# Altium PCB Prismino_Copter.PcbDoc
Units mm, origin at the board's own origin, x right, y up, seen from the top; angles counter-clockwise.
Board outline 50 x 50 mm, 2 copper layers (Top Layer, Bottom Layer); 43 components, 36 nets, 199 pads, 44 vias.
Unrouted connection lines stored in the file: 2.
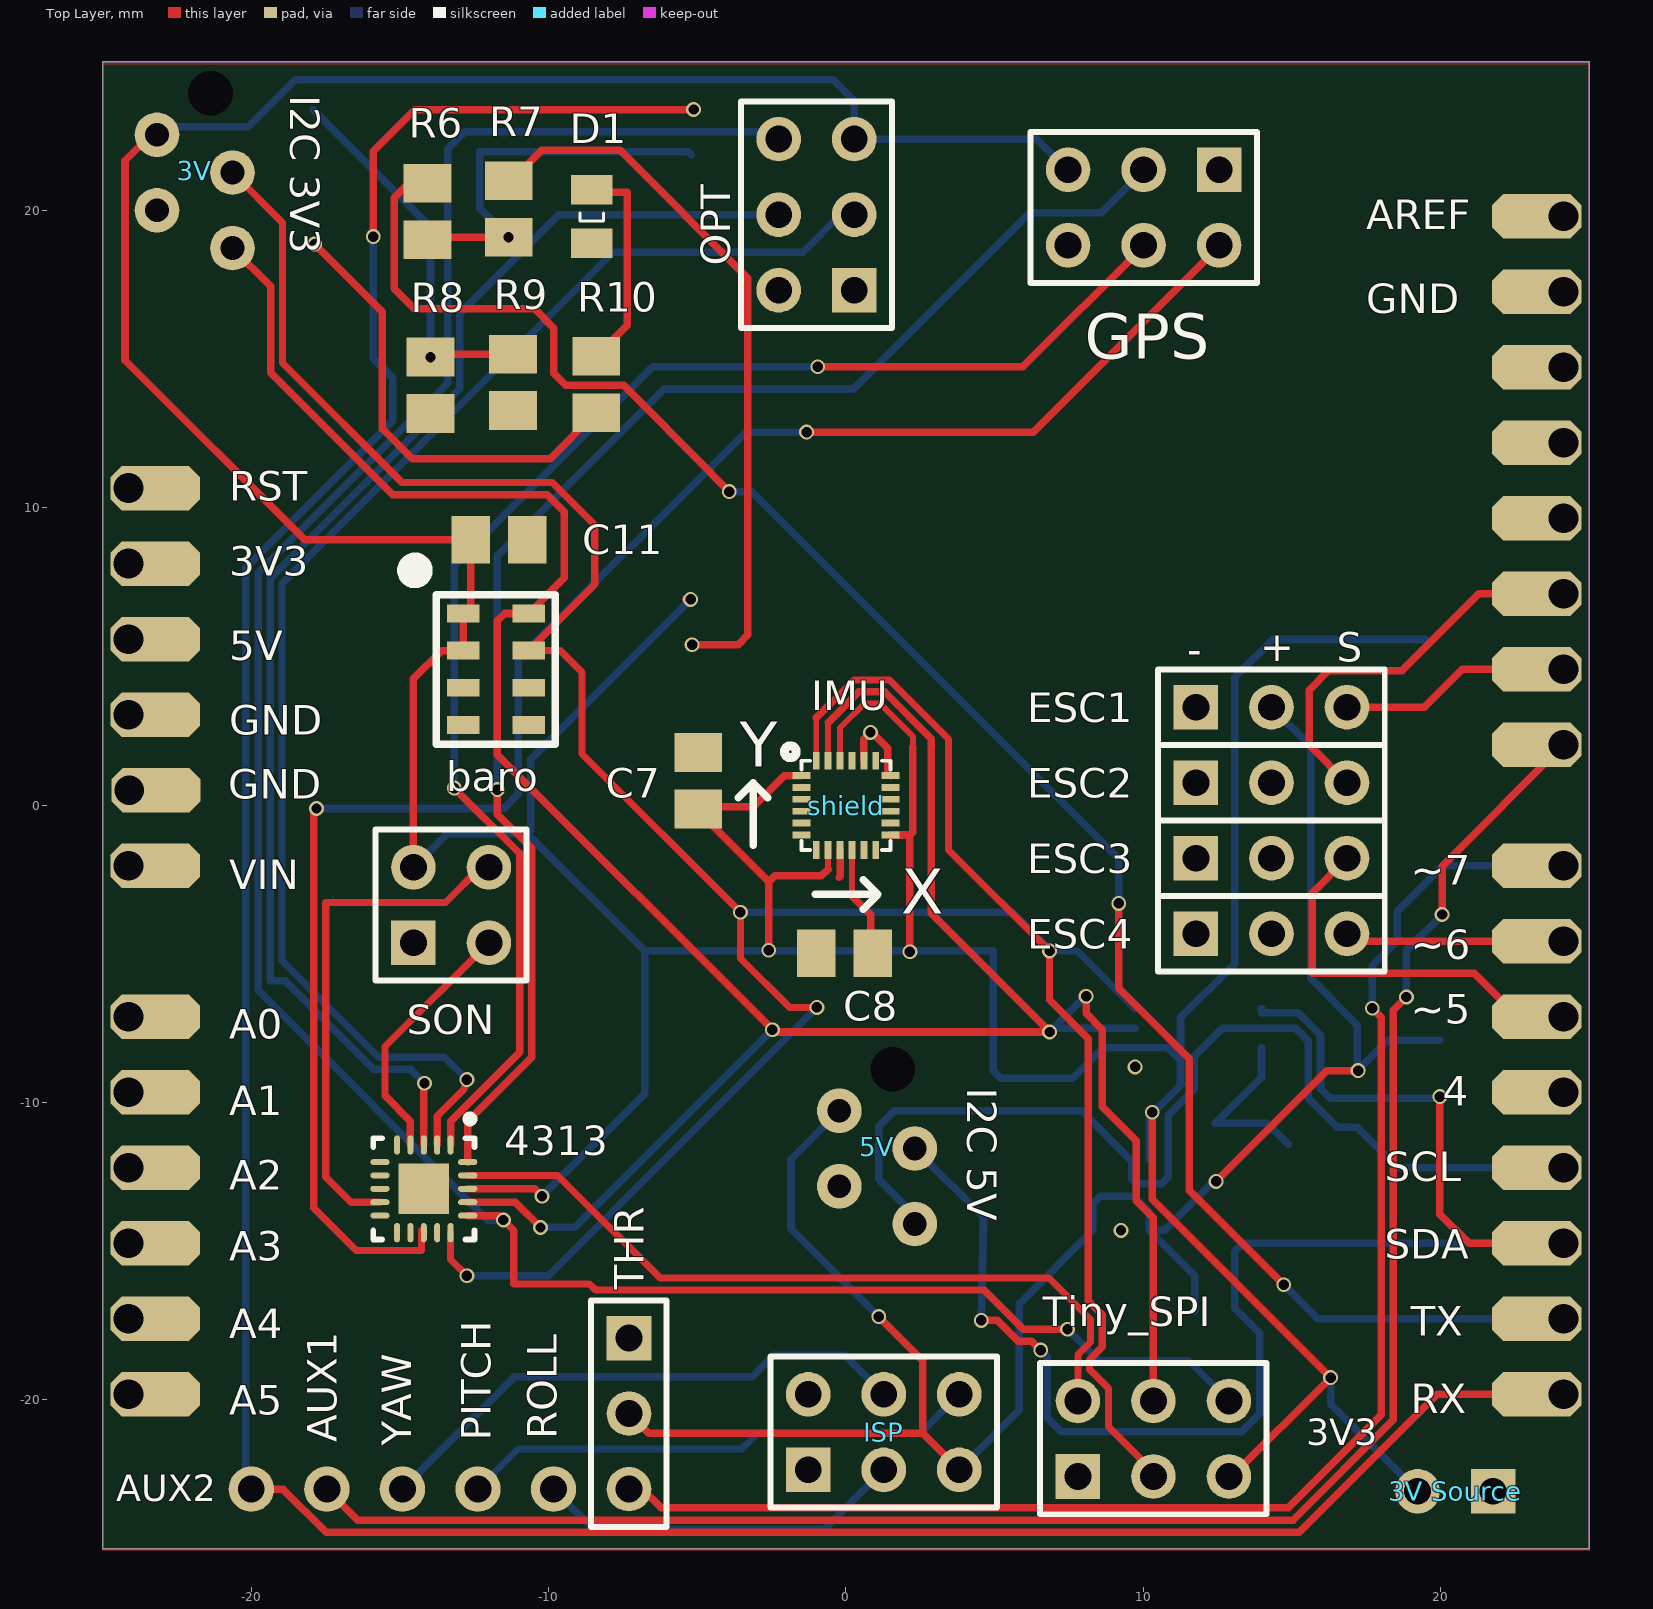
[diagram p0: Top Layer view]
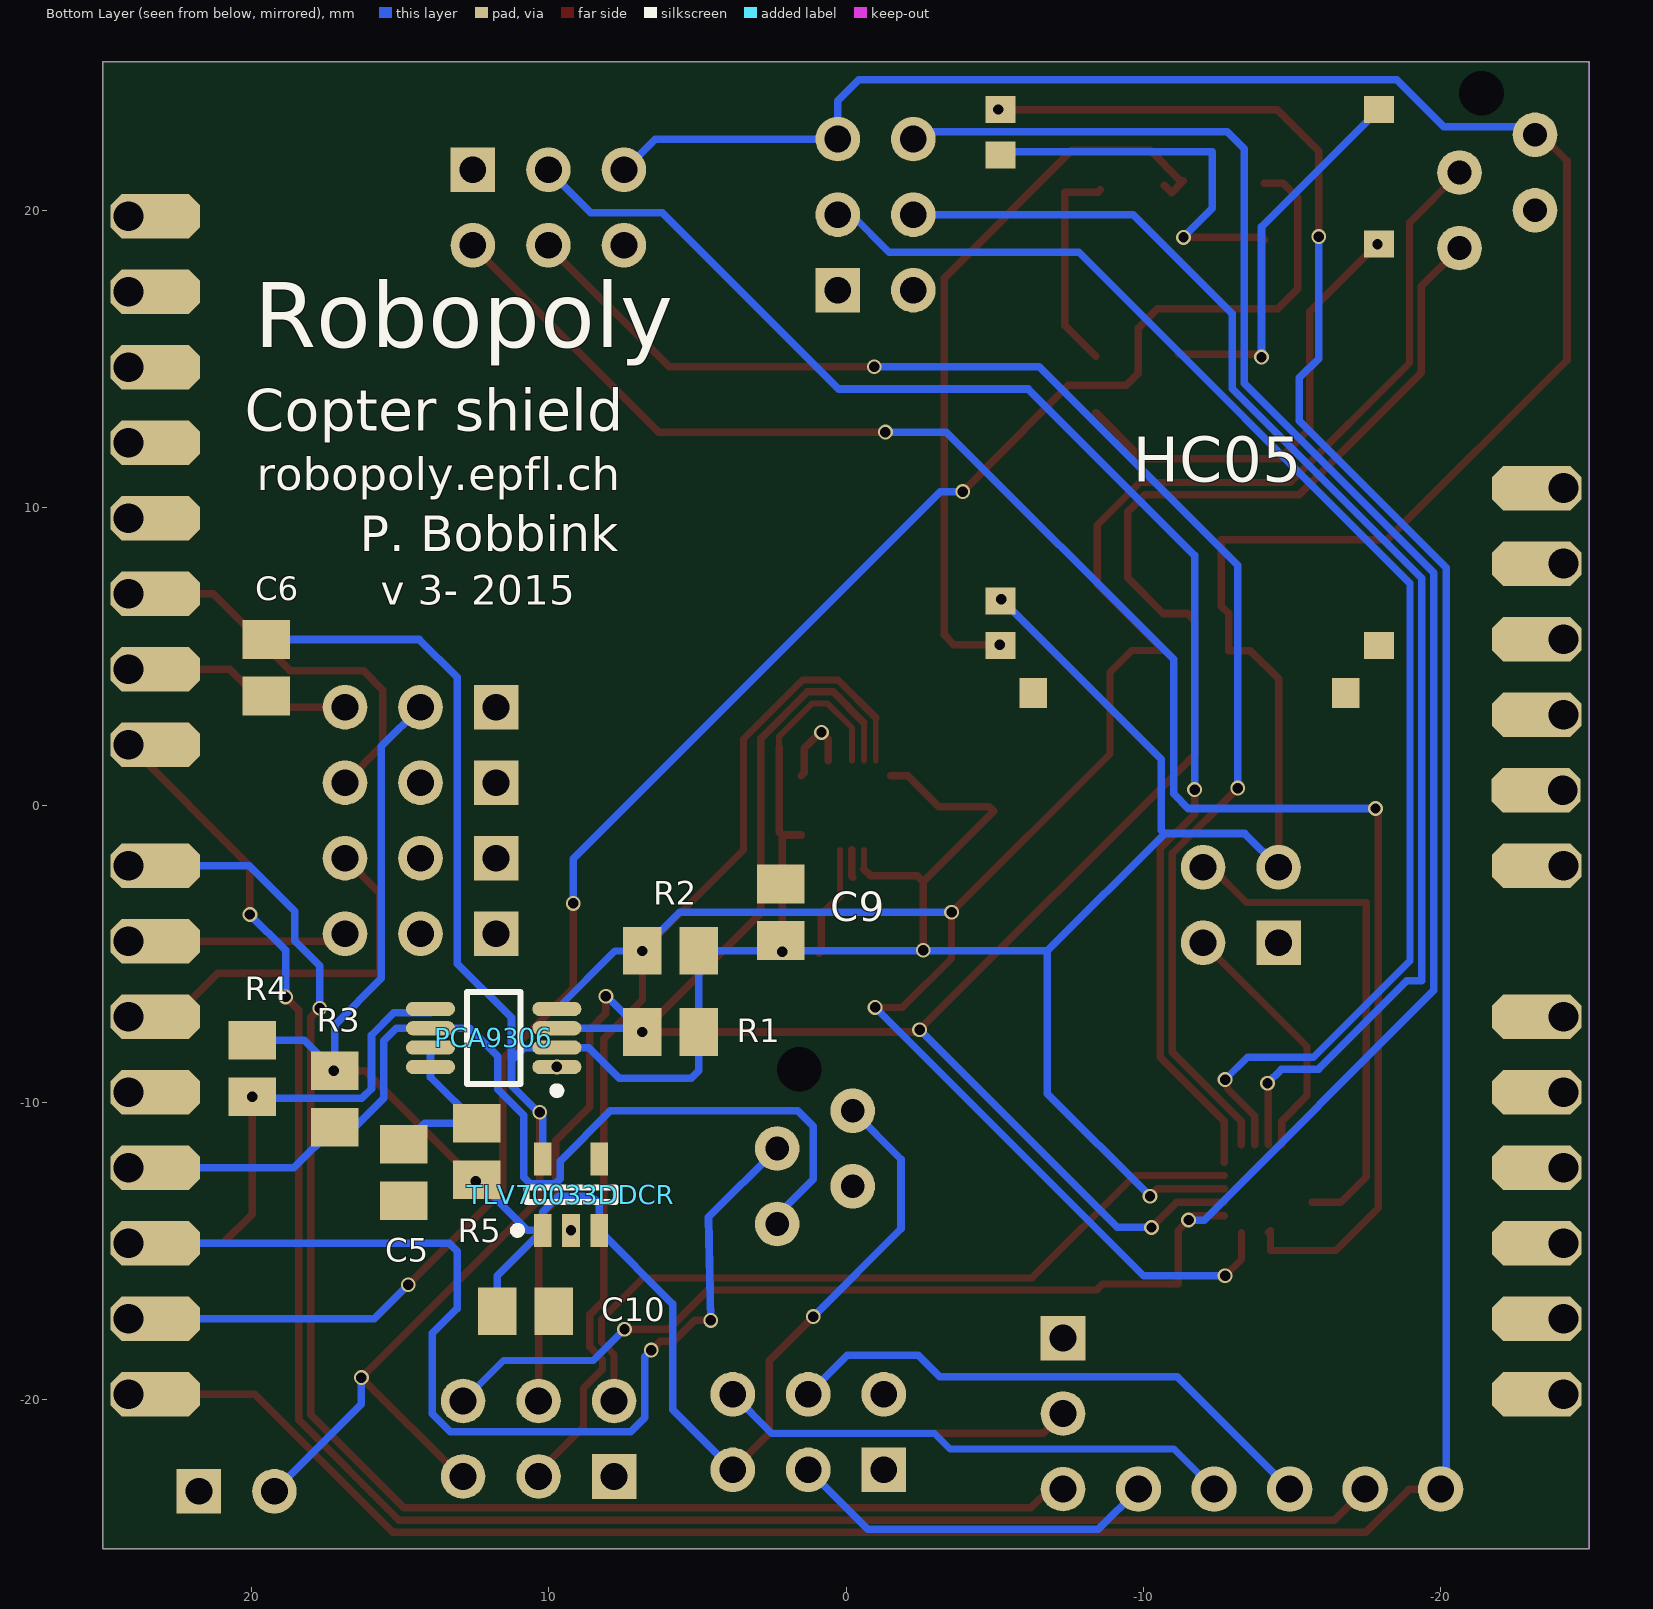
[diagram p1: Bottom Layer view, seen from below]

## Layer stack, top to bottom
Top Solder: solder mask 0.0102, Solder Resist, Dk 3.5
Top Layer: signal copper 0.0356
Dielectric1: dielectric 0.32, FR-4, Dk 4.8
Bottom Layer: signal copper 0.0356
Bottom Solder: solder mask 0.0102, Solder Resist, Dk 3.5

## Board outline
-25,25 -25,-25 25,-25 25,25

## Design rules (kind name [scope] priority, off if disabled: settings)
Clearance [All] p1: gap=0.155
ComponentClearance [All] p1: gap=0 collisioncheckmode=3 verticalgap=0 showdistances=FALSE
HoleSize [All] p1: absolutevalues=TRUE maxlimit=2.54 minlimit=0.3 maxpercent=80.000 minpercent=20.000
MinimumSolderMaskSliver [All] p1: minsoldermaskwidth=0.15
PlaneClearance [All] p1: clearance=0.5
PlaneConnect [All] p1: planeconnectstyle=Relief reliefexpansion=0.5 reliefentries=4 reliefconductorwidth=0.3 reliefairgap=0.3
PolygonConnect [All] p1: connectstyle=Relief reliefconductorwidth=0.3 reliefentries=4 polygonreliefangle="90 Angle" airgapwidth=0.254
RoutingCorners [All] p1: cornerstyle=45-Degree minsetback=1.5 maxsetback=1.5
RoutingVias [All] p1: holewidth=0.35 width=0.6 viastyle="Through Hole" minholewidth=0.3 minwidth=0.5 maxholewidth=0.4 maxwidth=0.7
SilkToSilkClearance [All] p1: silktosilkclearance=0.1
SilkToSolderMaskClearance [IsPad] p1: minsilkscreentomaskgap=0.1 clearancetoexposedcopper=TRUE
SolderMaskExpansion [All] p1: expansion=0.1
UnRoutedNet [InNet('No Net')] p1:
UnpouredPolygon [All] p1: allowunpoured=FALSE
Width [All] p1: maxlimit=0.26 minlimit=0.2 preferedwidth=0.25
20 further rules are at their usual default settings.

## Components (designator, comment, footprint, x,y, rotation, side; value= is the part's Value field where it differs from the comment)
3V "I2C" TYCO/215079-4 -23.175,22.55 r90 top
"3V Source" "Header 2" HEADER1x2 19.225,-23.075 r0 top
5V "I2C" TYCO/215079-4 -0.225,-10.275 r90 top
4313 "atTiny4313" QFN45P300X300X100_HS-21N -14.2,-12.9 r270 top
AUX1 "Pin" Pin#1 -16.27,-22.3 r90 top
AUX2 "Pin" Pin#2 -19.375,-22.95 r90 top
baro "MS5611" MS5611 -11.775,4.575 r0 top
C5 "C0805" MELF-R2012-0805 14.875,-12.35 r270 bottom
C6 "C0805" MELF-R2012-0805 19.5,4.625 r90 bottom
C7 "capa" MELF-R2012-0805 -4.975,0.825 r270 top
C8 "capa" MELF-R2012-0805 -0.05,-4.975 r0 top
C9 "capa" MELF-R2012-0805 2.2,-3.6 r270 bottom
C10 "C0805" MELF-R2012-0805 10.775,-17.025 r180 bottom
C11 "capa" MELF-R2012-0805 -11.675,8.925 r180 top
D1 "LED" LED-2012[0805] -8.55,19.8 r90 top
ESC1 "Header 3" HDR1X3 16.85,3.3 r180 top
ESC2 "Header 3" HDR1X3 16.85,0.76 r180 top
ESC3 "Header 3" HDR1X3 16.85,-1.78 r180 top
ESC4 "Header 3" HDR1X3 16.85,-4.32 r180 top
GPS "Header 3X2" HDR2X3 12.55,21.375 r180 top
HC05 "BLUETOOTH" BLUETOOTH -11.6,13.875 r180 bottom
IMU "MPU-9250" "MPU-9250 2" 0,0 r0 top
ISP "Header 3X2" HDR2X3 -1.27,-22.352 r0 top
OPT "Header 3X2" HDR2X3 0.275,17.325 r90 top
PCA9306 "PCA9306" TSOP65P490X110-8N 11.85,-7.825 r0 bottom
PITCH "Pin" Pin#3 -10.27,-22.35 r90 top
R1 "Res1" MELF-R2012-0805 5.9,-7.625 r180 bottom
R2 "Res1" MELF-R2012-0805 5.9,-4.9 r180 bottom
R3 "Res1" MELF-R2012-0805 17.2,-9.875 r90 bottom
R4 "Res1" MELF-R2012-0805 19.975,-8.85 r90 bottom
R5 "Res1" MELF-R2012-0805 12.425,-11.65 r270 bottom
R6 "resistor" MELF-R2012-0805 -14.075,19.975 r90 top
R7 "resistor" MELF-R2012-0805 -11.35,20.05 r270 top
R8 "resistor" MELF-R2012-0805 -13.975,14.125 r270 top
R9 "resistor" MELF-R2012-0805 -11.2,14.225 r90 top
R10 "resistor" MELF-R2012-0805 -8.4,14.15 r270 top
ROLL "Pin" Pin#4 -7.27,-22.35 r90 top
shield "Leonardo pins" "Leonardo pins" 0,0 r0 top locked
SON "Header 2X2" HDR2X2 -14.55,-4.625 r0 top
THR "Header 3" HDR1X3 -7.3,-23 r90 top
Tiny_SPI "Header 3X2" HDR2X3 7.8,-22.575 r0 top
TLV70033DDCR "TLV70033DDCR" TLV70033DDCR 9.25,-13.1 r90 bottom
YAW "Pin" Pin#5 -13.27,-22.3 r90 top

## Footprints (in the part's own frame and the unit in brackets; to place one, negate y for a bottom-side part, rotate by r counter-clockwise, add the part's x,y. Pads: shape width x height; smd on the part's side, far side on the other; paste and mask are expansions set on the pad)
BLUETOOTH [mil]
  rect 40x36 smd: 1(-251.97,375) 2(-251.97,315) 12(-251.97,-275.59) 13(-251.97,-334.65) 22(249,-334.65) 31(249,197) 34(249,375)
  rect 36x40 smd: 14(-208.66,-397.64) 21(205,-397.64)
HDR1X3 [mm] "Connector; Header; 3 Position"
  round 1.5 hole 0.9: 1(0,0) 2(2.54,0)
  rect 1.5x1.5 hole 0.9: 3(5.08,0)
  silkscreen extent -1.27,-1.27 6.35,1.27
HDR2X2 [mm] "Connector; Header; 2x2 Position"
  rect 1.5x1.5 hole 0.9: 1(0,0)
  round 1.5 hole 0.9: 2(0,2.54) 3(2.54,0) 4(2.54,2.54)
  silkscreen extent -1.27,-1.27 3.81,3.81
HDR2X3 [mm] "Connector; Header; 3x2 Position"
  rect 1.5x1.5 hole 0.9: 1(0,0)
  round 1.5 hole 0.9: 2(0,2.54) 3(2.54,0) 4(2.54,2.54) 5(5.08,0) 6(5.08,2.54)
  silkscreen extent -1.27,-1.27 6.35,3.81
HEADER1x2 [mm] "2.54mm Header"
  round 1.5 hole 0.9: 1(0,0)
  rect 1.5x1.5 hole 0.9: 2(2.54,0)
  body extent -1.27,-1.27 3.81,1.27, height 8.44
LED-2012[0805] [mm] "SMD LED - 0805 package"
  rect 1x1.4 smd: A(0.9,0) K(-0.9,0)
  silkscreen extent -0.15,-0.4 0.12,0.4, body extent -1.03,-0.46 1.03,0.45, height 0.84
"Leonardo pins" [mm]
  oct 3x1.5 hole 1 copper offset 0.9,0: 1(-24.13,10.668) 2(-24.13,8.128) 3(-24.13,5.588) 4(-24.13,3.048) 5(-24.105,0.508) 6(-24.13,-2.032) A0(-24.13,-7.112) A1(-24.13,-9.652) A2(-24.13,-12.192) A3(-24.13,-14.732) A4(-24.13,-17.272) A5(-24.13,-19.812)
  oct 3x1.5 hole 1 copper offset -0.9,0: 27(24.13,17.272) 28(24.13,19.812) D0(24.13,-19.812) D1(24.13,-17.272) D2(24.13,-14.732) D3(24.13,-12.192) D4(24.13,-9.652) D5(24.13,-7.112) D6(24.13,-4.572) D7(24.13,-2.032) D8(24.13,2.032) D9(24.13,4.572) D10(24.13,7.112) D11(24.13,9.652) D12(24.13,12.192) D13(24.13,14.732)
  Keep-Out Layer lines w0.025: -25,-25 25,-25 25,25 -25,25 -25,-25
MELF-R2012-0805 [mm] "Metal Electrode Face (MELF) Resistor; Body 2 x 1.4 mm (LxDia)"
  rect 1.3x1.6 smd: 1(-0.95,0) 2(0.95,0)
"MPU-9250 2" [mm]
  rect 0.6x0.23 smd paste-25.4 mask-25.4: 2(-1.5,0.6) 3(-1.5,0.2) 4(-1.5,-0.2) 5(-1.5,-0.6) 6(-1.5,-1) 8(-1.5,1) 13(1.5,-1) 14(1.5,-0.6) 15(1.5,-0.2) 16(1.5,0.2) 17(1.5,0.6) 18(1.5,1)
  rect 0.23x0.6 smd paste-25.4 mask-25.4: 7(-1,-1.5) 8(-0.6,-1.5) 9(-0.2,-1.5) 10(0.2,-1.5) 11(0.6,-1.5) 12(1,-1.5) 18(0.6,1.5) 19(1,1.5) 21(0.2,1.5) 22(-0.2,1.5) 23(-0.6,1.5) 24(-1,1.5)
  silkscreen extent -2.07,-1.5 1.5,2
MS5611 [mm] "barometer Meas Spec"
  rect 1.1x0.6 smd: 1(-1.1,1.875) 2(-1.1,0.625) 3(-1.1,-0.625) 4(-1.1,-1.875) 5(1.1,-1.875) 6(1.1,-0.625) 7(1.1,0.625) 8(1.1,1.875)
  silkscreen extent -3.02,-2.52 2,3.62
Pin#1 [mm]
  round 1.524 hole 0.9: 1(-0.7,1.19)
Pin#2 [mm]
  round 1.524 hole 0.9: 1(-0.05,0.625)
Pin#3 [mm]
  round 1.524 hole 0.9: 1(-0.65,2.11)
Pin#4 [mm]
  round 1.524 hole 0.9: 1(-0.65,2.57)
Pin#5 [mm]
  round 1.524 hole 0.9: 1(-0.7,1.65)
QFN45P300X300X100_HS-21N [mm] "QFN, 20-Leads, Body 3.00x3.00mm, Pitch 0.45mm, Thermal Pad 1.55x1.55mm, IPC Medium Density"
  oval 0.65x0.2 smd: 1(-1.475,0.9) 2(-1.475,0.45) 3(-1.475,0) 4(-1.475,-0.45) 5(-1.475,-0.9) 11(1.475,-0.9) 12(1.475,-0.45) 13(1.475,0) 14(1.475,0.45) 15(1.475,0.9)
  oval 0.2x0.65 smd: 6(-0.9,-1.475) 7(-0.45,-1.475) 8(0,-1.475) 9(0.45,-1.475) 10(0.9,-1.475) 16(0.9,1.475) 17(0.45,1.475) 18(0,1.475) 19(-0.45,1.475) 20(-0.9,1.475)
  rect 1.7x1.7 smd: 21(0,0)
  silkscreen extent -2.47,-1.7 1.7,1.7, body extent -1.55,-1.55 1.55,1.55, height 0.85
TLV70033DDCR [mm] "SOT23, 5-Leads, Body 3.0x3.0mm (max), Pitch 0.95mm, IPC Medium Density"
  rect 1.1x0.6 smd: 1(-1.2,0.95) 2(-1.2,0) 3(-1.2,-0.95) 4(1.2,-0.95) 5(1.2,0.95)
  silkscreen extent -1.32,-1.5 0.25,1.93, body extent -0.87,-1.52 0.87,1.53, height 1.1
TSOP65P490X110-8N [mm] "TSOP, 8-Leads, Body 3,00x3,00mm, Pitch 0,65mm, IPC Medium Density"
  oval 1.65x0.48 smd: 1(-2.125,0.975) 2(-2.125,0.325) 3(-2.125,-0.325) 4(-2.125,-0.975) 5(2.125,-0.975) 6(2.125,-0.325) 7(2.125,0.325) 8(2.125,0.975)
  silkscreen extent -2.25,-1.55 0.9,1.9, body extent -1.55,-1.55 1.55,1.55, height 1.1
TYCO/215079-4 [mm]
  round 1.5 hole 0.8: 1(0,0) 2(-1.27,-2.54) 3(-2.54,0) 4(-3.81,-2.54)
  round 1.3 hole 1.5 unplated: 5(1.4,-1.8)
  body extent -5.41,-3.74 1.6,1.26, height 4

## Part data
3V 5V: library part Micromatch-I2C, "Micromatch I2C Connector"
"3V Source": "Header, 2-Pin"
C5 C6 C10: "Ceramic Chip Capacitor - Standard"
C7 C8 C9 C11: library part capacitor
ESC1 ESC2 ESC3 ESC4 THR: "Header, 3-Pin"
GPS ISP OPT Tiny_SPI: "Header, 3-Pin, Dual row"
PCA9306: library part Component_1_1, "I²C shifting voltage"
R1 R2 R3 R4 R5 R6 R7 R8 R9 R10: "Resistor"
SON: "Header, 2-Pin, Dual row"
TLV70033DDCR: library part TLV700xx, "Header, 2-Pin"

## Via types
v1: diameter 0.5, hole 0.35, Top Layer to Bottom Layer, 44 vias

## Nets (pads, with @x,y where several pads share a name; then routed paths per layer and width w, separated by ;. In a path a pad name is that pad's centre, name@x,y a point inside that pad or via, vN(x,y) a via of type N, cw(c..) or ccw(c..) an arc to the next point about the centre after c; other vN are vias at no path point)
3V3: 3V.1 4313.18 "3V Source.1" baro.1 baro.2 C6.2 C7.2 C9.2 C11.2 GPS.5 HC05.12 IMU.8 IMU.13 IMU.22 OPT.5 PCA9306.2 R1.2 R2.2 SON.2 Tiny_SPI.5 TLV70033DDCR.5 | length 193.4
  Top Layer w0.2: -0.6,-2.15 IMU.8@-0.6,-1.5 ; IMU.22 -0.2,2.605 0.625,3.43 1.137,3.43 2.25,2.316 2.25,1.95
  Top Layer w0.254: 3V.1 -23.375,22.55 -24.25,21.675 -24.25,14.975 -18.2,8.925 C11.2 -12.625,6.7 baro.1 baro.2 -13.6,5.2 -14.55,4.25 SON.2 ; 4313.18 -10.475,-12.9 v1(-10.225,-13.15) ; v1@-5.381,6.925 v1(-5.225,6.925) ; v1(-2.6,-4.875) -2.6,-2.575 ; IMU.8@-1.5,1 -2.075,1 -3.125,-0.05 -4.825,-0.05 -4.975,-0.2 -2.6,-2.575 ; -0.6,-2.15 -0.825,-2.375 -2.4,-2.375 -2.6,-2.575 ; IMU.13 2.15,-1 v1(2.15,-4.925) ; 2.25,-0.9 2.25,1.95 ; v1(10.3,-10.325) 10.3,-13.25 v1(16.3,-19.25) 12.975,-22.575 Tiny_SPI.5
  Bottom Layer w0.254: 3V.1 -22.9,22.825 -20.1,22.825 -18.525,24.4 -0.425,24.4 0.275,23.7 OPT.5 6.415,22.405 GPS.5@7.47,21.35 ; SON.2 -13.415,-0.95 -10.725,-0.95 ; v1(-10.225,-13.15) -6.775,-9.7 -6.775,-4.9 ; v1(-5.225,6.925) -10.609,1.541 -10.609,-0.834 -10.725,-0.95 ; TLV70033DDCR.5 10.2,-10.475 11.3,-9.375 11.25,-9.325 11.25,-8.575 ; v1(16.3,-19.25) 16.3,-20.15 19.225,-23.075 ; C6.2 14.35,5.575 13.075,4.3 13.075,-5.325 11.25,-7.15 11.25,-8.575 ; -10.725,-0.95 -6.775,-4.9 ; -6.775,-4.9 R2.2 R1.2 4.95,-8.925 5.2,-9.175 7.625,-9.175 8.65,-8.15 PCA9306.2 10.825,-8.15 11.25,-8.575
AUX1: AUX1.1 shield.D8 | length 62.8
  Top Layer w0.254: AUX1.1 -16.416,-24.044 -14.488,-24.044 -14.485,-24.041 -12.815,-24.041 -12.812,-24.044 -11.948,-24.044 -11.945,-24.041 -10.275,-24.041 -10.272,-24.044 15.034,-24.044 18.409,-20.669 18.409,-6.891 v1(18.85,-6.45) ; v1(20.05,-3.675) 20.05,-2.048 shield.D8
  Bottom Layer w0.254: v1(18.85,-6.45) 18.85,-4.875 v1(20.05,-3.675)
BTAT: R8.2
ESC1: ESC1.1 shield.D9 | length 7.8
  Top Layer w0.254: ESC1.1 19.45,3.3 20.722,4.572 shield.D9
ESC2: ESC2.1 shield.D10 | length 13.5
  Top Layer w0.254: ESC2.1 15.575,2.035 15.575,3.875 16.225,4.525 18.7,4.525 21.287,7.112 shield.D10
ESC3: ESC3.1 shield.D5 | length 13.4
  Top Layer w0.254: ESC3.1 15.675,-2.955 15.675,-5.65 21.125,-5.65 22.587,-7.112 shield.D5
ESC4: ESC4.1 shield.D6 | length 7.4
  Top Layer w0.24: ESC4.1 17.102,-4.572 shield.D6
GND: 3V.3 5V.3 4313.8 "3V Source.2" baro.3 baro.4 C5.2 C6.1 C7.1 C8.1 C9.1 C10.2 C11.1 D1.K ESC1.3 GPS.1 HC05.14 HC05.21 HC05.22 IMU.9 IMU.18 ISP.1 OPT.1 PCA9306.1 R9.1 shield.4 shield.5 shield.27 SON.1 THR.3 Tiny_SPI.1 TLV70033DDCR.2 | length 3.7
  Top Layer w0.254: -0.225,-2.425 -0.191,-2.391 -0.191,-1.981 -0.2,-1.972 IMU.9 ; IMU.18@0.6,1.5 0.6,2.225 v1(0.825,2.45) 0.864,2.45 1.397,1.917 1.397,1.103 IMU.18@1.5,1
  other v1: 9.25,-14.3 9.725,-8.8
GPSON_OFF: 4313.14
NetC5_1: C5.1 PCA9306.7 PCA9306.8 R5.1 | length 5.9
  Bottom Layer w0.254: PCA9306.7 PCA9306.8 13.975,-9.15 R5.1 14.175,-10.7 C5.1
NetC8_2: C8.2 IMU.10 | length 3.8
  Top Layer w0.2: 0.2,-3.05 IMU.10
  Top Layer w0.254: 0.2,-3.05 0.825,-3.675 0.825,-4.9 C8.2
NetD1_A: D1.A R10.1 | length 7.2
  Top Layer w0.254: D1.A -8.475,20.625 -7.35,20.625 -7.35,16.15 R10.1
NetHC05_2: HC05.2 R6.1 R7.2 | length 13.2
  Top Layer w0.254: R6.1 -14,19.1 v1(-11.35,19.1)
  Bottom Layer w0.254: v1(-11.35,19.1) -12.325,20.075 -12.325,21.975 -5.299,21.975 HC05.2
NetHC05_13: HC05.13 R7.1 | length 25.3
  Top Layer w0.254: R7.1@-10.7,20.85 -10.95,20.6 R7.1 -11.25,21 -10.225,22.025 -7.6,22.025 -3.297,17.722 -3.297,5.728 -3.625,5.4 v1(-5.175,5.4) v1@-5.25,5.475
NetHC05_31: HC05.31 R10.2 | length 15.4
  Top Layer w0.254: v1(-17.875,18.875) -15.6,16.6 -15.6,12.672 -14.589,11.661 -9.95,11.661 -8.411,13.2 R10.2
NetHC05_34: HC05.34 R8.1 R9.2 | length 12.8
  Top Layer w0.254: v1(-13.975,15.075) -13.875,15.175 R9.2
  Bottom Layer w0.254: HC05.34 -13.975,19.45 v1(-13.975,15.075)
NRST: 4313.13 GPS.2 | length 59.3
  Top Layer w0.24: v1@-17.9,-0.109 -17.9,-13.55 -16.475,-14.975 -14.275,-14.975 -14.275,-14.3 4313.13
  Top Layer w0.254: v1(-1.325,12.55) 6.29,12.55 GPS.2@12.55,18.81
  Bottom Layer w0.254: v1(-17.809,-0.109) -11.509,-0.109 -11.018,0.382 -11.018,4.907 -3.375,12.55 v1(-1.325,12.55)
OPTCL: 4313.3 OPT.4 | length 45.9
  Top Layer w0.254: 4313.3 -14.2,-9.375 v1(-14.175,-9.35)
  Bottom Layer w0.254: v1(-14.175,-9.35) -14.648,-8.877 -15.892,-8.877 -18.86,-5.909 -19.366,-5.909 -19.366,7.634 -12.991,14.009 -12.991,16.534 -9.66,19.865 OPT.4
OPTCSEL: 4313.16 OPT.6 Tiny_SPI.6 | length 84
  Top Layer w0.24: v1(-11.525,-13.95) -11.175,-14.3 -11.175,-16.1 -8.629,-16.1 -8.431,-16.298 4.631,-16.298 5.958,-17.625 v1(7.45,-17.625) ; Tiny_SPI.6@12.675,-19.83 Tiny_SPI.6
  Top Layer w0.254: 4313.16 -11.675,-13.8 v1(-11.525,-13.95)
  Bottom Layer w0.24: v1(7.45,-17.625) 8.5,-18.675 11.52,-18.675 Tiny_SPI.6
  Bottom Layer w0.254: v1(-11.525,-13.95) -12.05,-13.95 -19.775,-6.225 -19.775,7.825 -13.4,14.2 -13.4,22.075 -12.825,22.65 -2.605,22.65 -2.265,22.99 OPT.6
OPTDIO: 4313.2 OPT.3 | length 47.5
  Top Layer w0.24: 4313.2 -13.75,-10.45 -12.85,-9.55 v1(-12.75,-9.225)
  Bottom Layer w0.24: v1(-12.75,-9.225) -13.5,-8.475 -15.725,-8.475 -18.964,-5.236 -18.964,7.467 -7.831,18.6 -1.45,18.6 -0.185,19.865 OPT.3
PITCH: ISP.6 PITCH.1 | length 17.5
  Bottom Layer w0.24: PITCH.1 -11.03,-21.65 -3.5,-21.65 -2.975,-21.125 2.497,-21.125 ISP.6
ROLL: ISP.3 ROLL.1 | length 12.5
  Bottom Layer w0.254: ROLL.1 -8.49,-24.35 -0.728,-24.35 ISP.3
RX: AUX2.1 HC05.1 shield.D0 | length 105.4
  Top Layer w0.254: AUX2.1 -18.936,-23 -17.483,-24.453 -14.318,-24.453 -14.315,-24.45 -12.985,-24.45 -12.982,-24.453 -11.778,-24.453 -11.775,-24.45 -10.445,-24.45 -10.442,-24.453 15.247,-24.453 19.888,-19.812 shield.D0 ; v1(-15.9,19.125) -15.9,22 -14.5,23.4 v1(-5.125,23.4)
  Bottom Layer w0.254: AUX2.1 -20.184,-22.816 -20.184,7.994 -15.25,12.928 -15.25,14.375 -15.9,15.025 v1(-15.9,19.125)
RXD: 4313.1 GPS.4 | length 49
  Top Layer w0.254: 4313.1 -13.3,-10.628 -10.978,-8.306 -10.978,-1.622 v1(-13.175,0.575) ; v1(-0.95,14.75) 5.95,14.75 GPS.4@10.01,18.81
  Bottom Layer w0.254: v1(-13.175,0.575) -13.175,8.075 -6.5,14.75 v1(-0.95,14.75)
SCL3V3: 3V.4 4313.17 baro.8 IMU.23 PCA9306.3 R1.1 Tiny_SPI.4 | length 98.3
  Top Layer w0.2: IMU.23@-0.598,1.5 -0.598,2.777
  Top Layer w0.254: 3V.4 -19.352,17.457 -19.352,14.552 -15.248,10.448 -10.048,10.448 -9.475,9.875 -9.475,7.65 baro.8 -11.475,6.45 -11.725,6.2 -11.725,1.7 -2.4,-7.625 v1(6.85,-7.625) 2.862,-3.638 2.862,2.244 1.295,3.812 0.437,3.812 -0.598,2.777 ; 4313.17 -11.125,-13.35 v1(-10.275,-14.2) ; v1(8.075,-6.425) 8.075,-7 8.625,-7.55 8.625,-10.135 9.768,-11.278 9.768,-13.296 10.34,-13.868 Tiny_SPI.4
  Bottom Layer w0.254: v1(-10.275,-14.2) -9.125,-14.2 v1(-2.475,-7.55) ; v1(6.85,-7.625) R1.1@6.975,-7.5 ; v1(8.075,-6.425) 8.05,-6.425 R1.1@6.975,-7.5 ; PCA9306.3 R1.1@6.975,-7.5
SCL5V: 5V.4 PCA9306.6 R3.1 shield.D3 | length 35.5
  Bottom Layer w0.254: 5V.4 2.315,-13.79 1.1,-12.575 1.1,-10.8 1.625,-10.275 7.924,-10.275 9.618,-11.969 9.618,-12.567 9.783,-12.732 10.617,-12.732 10.832,-12.517 10.832,-10.421 11.709,-9.544 11.709,-8.441 12.65,-7.5 PCA9306.6 15.125,-7.5 15.55,-7.925 15.55,-9.85 16.525,-10.825 R3.1 18.567,-12.192 shield.D3
SDA3V3: 3V.2 4313.15 baro.7 IMU.24 PCA9306.4 R2.1 Tiny_SPI.3 | length 109.3
  Top Layer w0.2: IMU.24 -1,2.944
  Top Layer w0.24: 3V.2 -18.95,19.595 -18.95,14.875 -14.925,10.85 -9.875,10.85 -8.45,9.425 -8.45,7.425 baro.7 -9.6,5.2 -8.875,4.475 -8.875,1.725 v1(-3.55,-3.6) -3.55,-5.15 -1.904,-6.796 v1(-0.979,-6.796) ; 4313.15 -13.3,-15.275 v1(-12.75,-15.825) ; -1,2.944 0.27,4.214 1.461,4.214 3.45,2.225 3.45,-1.5 v1(6.85,-4.9) 6.85,-6.55 8.15,-7.85 8.15,-16.666 8.62,-17.136 8.62,-18.214 8.195,-18.639 8.195,-18.98 8.825,-19.61 8.825,-20.9 10.34,-22.415 Tiny_SPI.3
  Bottom Layer w0.24: v1(-12.75,-15.825) -10.008,-15.825 v1(-0.979,-6.796) ; v1(-3.55,-3.6) 5.6,-3.6 6.85,-4.85 v1(6.85,-4.9) 7.775,-4.9 PCA9306.4
SDA5V: 5V.2 PCA9306.5 R4.1 shield.D2 | length 53
  Top Layer w0.254: v1(4.55,-17.325) 5.09,-17.325 5.792,-18.027 6.252,-18.027 v1@6.525,-18.3 ; v1(19.975,-9.8) 19.975,-13.75 20.957,-14.732 shield.D2
  Bottom Layer w0.254: 5V.2 4.625,-13.855 v1(4.55,-17.325) ; v1(6.55,-18.325) 6.768,-18.543 6.768,-20.594 7.241,-21.067 13.307,-21.067 13.912,-20.462 13.912,-17.762 13.075,-16.925 13.075,-15 13.343,-14.732 shield.D2 ; PCA9306.5 13.975,-6.978 15.207,-6.978 15.959,-7.73 15.959,-9.533 16.283,-9.857 19.975,-9.857 v1(19.975,-9.8)
SONECHO: 4313.9 SON.4 | length 17.4
  Top Layer w0.24: 4313.9 -16.65,-13.35 -17.5,-12.5 -17.5,-3.275 -13.475,-3.275 -12.285,-2.085 SON.4
SONTRIGG: 4313.4 SON.3 | length 8.6
  Top Layer w0.24: -15.5,-9.775 -15.5,-8.115 SON.3
  Top Layer w0.254: -15.5,-9.775 -14.65,-10.625 4313.4
THR: shield.D7 THR.1 | length 50.5
  Top Layer w0.254: THR.1 -6.85,-23 -6.218,-23.632 14.868,-23.632 18,-20.5 18,-7.125 v1(17.7,-6.825)
  Bottom Layer w0.254: v1(17.7,-6.825) 17.7,-5.4 18.542,-4.558 18.542,-3.558 20.068,-2.032 shield.D7
TRST: 4313.19 Tiny_SPI.2 | length 25.9
  Top Layer w0.24: 4313.19 -9.7,-12.45 -6.247,-15.903 6.828,-15.903 8.225,-17.3 8.225,-18.05 7.8,-18.475 Tiny_SPI.2
TX: R6.2 shield.D1 | length 64.1
  Top Layer w0.254: R6.2 -14.7,20.925 -15.191,20.434 -15.191,17.366 -14.525,16.7 -10.475,16.7 -9.825,16.05 -9.825,14.525 -9.432,14.132 -7.483,14.132 -4.525,11.174 -4.525,11.15 v1(-3.925,10.55) ; v1(9.175,-3.3) 9.175,-6.15 11.55,-8.525 11.55,-12.95 v1(14.725,-16.125)
  Bottom Layer w0.254: v1(-3.925,10.55) -3.175,10.55 9.175,-1.8 v1(9.175,-3.3) ; v1(14.725,-16.125) 15.872,-17.272 shield.D1
TXD: 4313.20 GPS.3 | length 48.9
  Top Layer w0.254: 4313.20 -12.725,-10.632 -10.569,-8.476 -10.569,-1.453 -11.725,-0.297 v1(-11.725,0.525)
  Bottom Layer w0.254: v1(-11.725,0.525) -11.725,8.4 -6.125,14 0.25,14 6.175,19.925 8.585,19.925 GPS.3@10.01,21.35
VCC: 5V.1 C10.1 ESC1.2 ISP.5 R3.2 R4.2 R5.2 shield.3 THR.2 TLV70033DDCR.1 TLV70033DDCR.3 | length 68.2
  Top Layer w0.254: THR.2@-7.21,-20.46 THR.2 -6.635,-21.125 2.583,-21.125 ; v1(1.1,-17.2) 2.583,-18.683 2.583,-21.125 ; ISP.5 2.583,-21.125 ; v1(12.45,-12.65) 16.175,-8.925 v1(17.225,-8.925)
  Bottom Layer w0.254: 5V.1 -1.85,-11.9 -1.85,-14.25 v1(1.1,-17.2) ; ISP.5 5.825,-20.337 5.825,-16.775 TLV70033DDCR.3 8.3,-13.4 8.55,-13.15 9.675,-13.15 10.2,-13.675 TLV70033DDCR.1 ; C10.1 11.725,-15.825 TLV70033DDCR.1 ; R5.2 10.725,-14.3 TLV70033DDCR.1 ; ESC1.2 15.625,1.985 15.625,-5.825 17.2,-7.4 R3.2 18.225,-7.9 R4.2
YAW: ISP.4 YAW.1 | length 18.6
  Bottom Layer w0.254: YAW.1 -11.145,-19.225 -3.15,-19.225 -2.425,-18.5 -0.042,-18.5 ISP.4
pads on no net: 3V.5 5V.5 4313.5 4313.6 4313.7 4313.10 4313.11 4313.12 4313.21 baro.5 baro.6 ESC2.2 ESC2.3 ESC3.2 ESC3.3 ESC4.2 ESC4.3 GPS.6 IMU.2 IMU.3 IMU.4 IMU.5 IMU.6 IMU.7 IMU.11 IMU.12 IMU.14 IMU.15 IMU.16 IMU.17 IMU.19 IMU.21 ISP.2 OPT.2 shield.1 shield.2 shield.6 shield.28 shield.A0 shield.A1 shield.A2 shield.A3 shield.A4 shield.A5 shield.D4 shield.D11 shield.D12 shield.D13 TLV70033DDCR.4

## Polygon pours and split planes (outlines as drawn)
GND on Top Layer "GND PLANE TOP" (solid, remove dead copper, shelved, pour order 3): -25.006,-25.062 -25.006,24.938 24.994,24.938 24.994,-25.062
GND on Bottom Layer "GND plane" (solid, remove dead copper, shelved, pour order 2): -25,25 25,25 25,-25 -25,-25

## Silkscreen, mask and mechanical layers (free items; w line width, h text height)
Top Overlay:
  lines w0.254: -3.625,0.25 -3.15,0.725 ; -3.125,-1.35 -3.125,0.75 ; -3.1,0.725 -2.625,0.25 ; -1.025,-3 1.075,-3 ; 0.575,-3.5 1.05,-3.025 ; 0.575,-2.5 1.05,-2.975
  text "I2C 3V3" at -18.7,23.875 h1 r270
  text "AREF" at 17.5,19.375 h1
  text "GND" at 17.5,16.55 h1
  text "RST" at -20.75,10.25 h1
  text "3V3" at -20.75,7.725 h1
  text "5V" at -20.75,4.875 h1
  text "+" at 13.925,4.85 h1
  text "S" at 16.5,4.825 h1
  text "-" at 11.475,4.75 h1
  text "GND" at -20.75,2.375 h1
  text "Y" at -3.575,1.3 h1.52
  text "GND" at -20.775,0.225 h1
  text "~7" at 19,-2.675 h1
  text "VIN" at -20.75,-2.825 h1
  text "X" at 1.85,-3.65 h1.52
  text "~6" at 19,-5.175 h1
  text "~5" at 19,-7.35 h1
  text "A0" at -20.75,-7.85 h1
  text "I2C 5V" at 4.075,-9.5 h1 r270
  text "4" at 20.075,-10.1 h1
  text "A1" at -20.75,-10.425 h1
  text "SCL" at 18.125,-12.65 h1
  text "A2" at -20.75,-12.925 h1
  text "SDA" at 18.125,-15.25 h1
  text "A3" at -20.75,-15.325 h1
  text "TX" at 19,-17.85 h1
  text "A4" at -20.75,-17.925 h1
  text "RX" at 19,-20.45 h1
  text "A5" at -20.75,-20.5 h1
  text "3V3" at 15.475,-21.525 h0.9
Bottom Overlay:
  text "Robopoly" at 19.9,15.4 h2.2
  text "Copter shield" at 20.225,12.6 h1.4
  text "robopoly.epfl.ch" at 19.825,10.6 h1.1
  text "P. Bobbink" at 16.35,8.55 h1.2
  text "v 3- 2015" at 15.65,6.75 h1